# Altium PCB converter.PcbDoc
Units mil, origin at the board's own origin, x right, y up, seen from the top; angles counter-clockwise.
Board outline 2165.35 x 806 mil, 2 copper layers (Top Layer, Bottom Layer); 37 components, 46 nets, 184 pads, 78 vias.
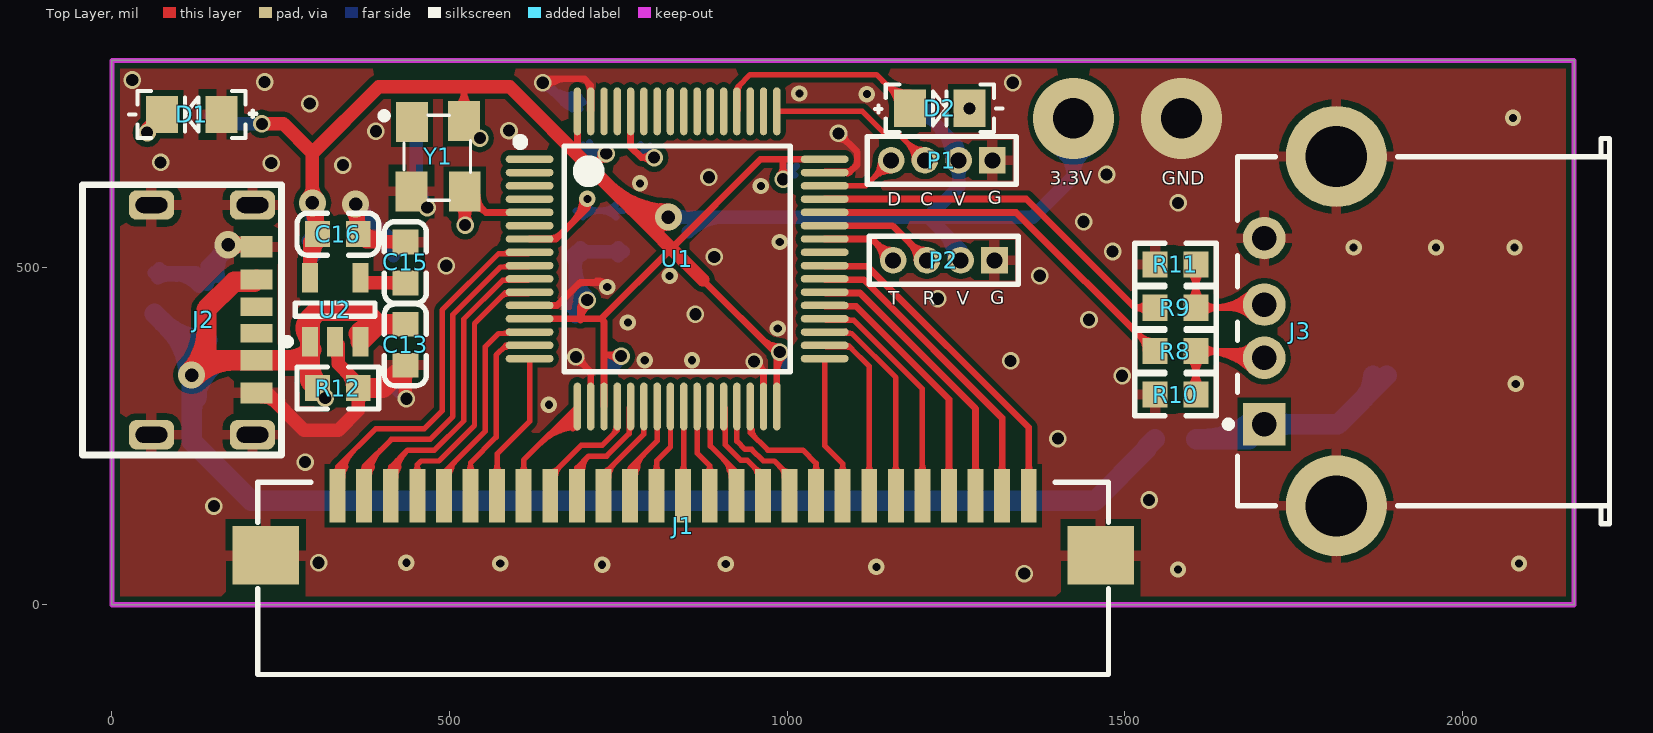
[diagram p0: Top Layer view]
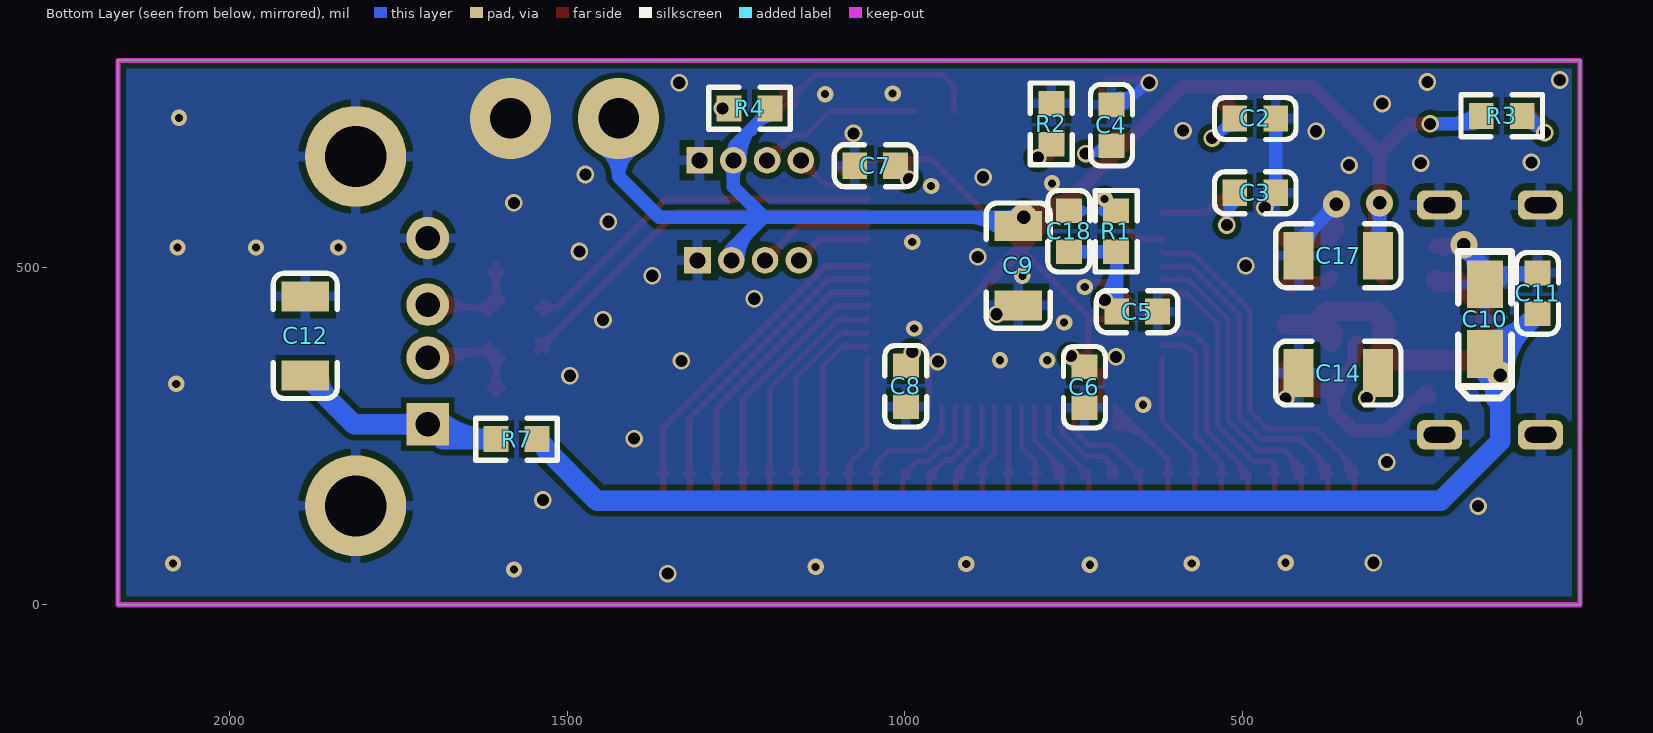
[diagram p1: Bottom Layer view, seen from below]
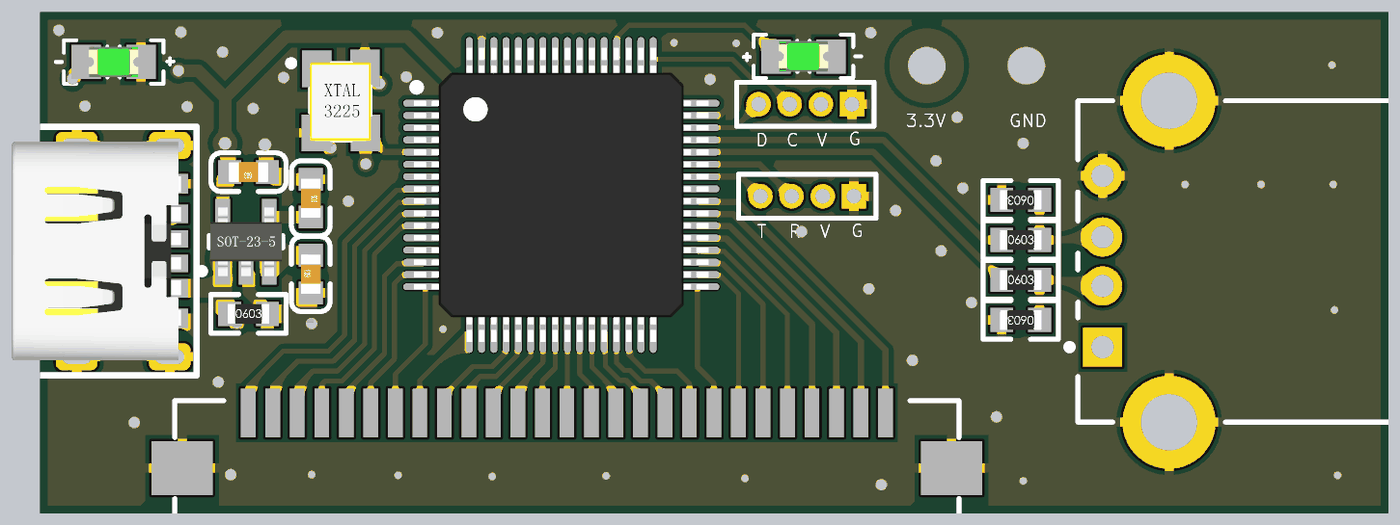
[diagram p2: 3D render of the assembled board from above, using the file's embedded part models]
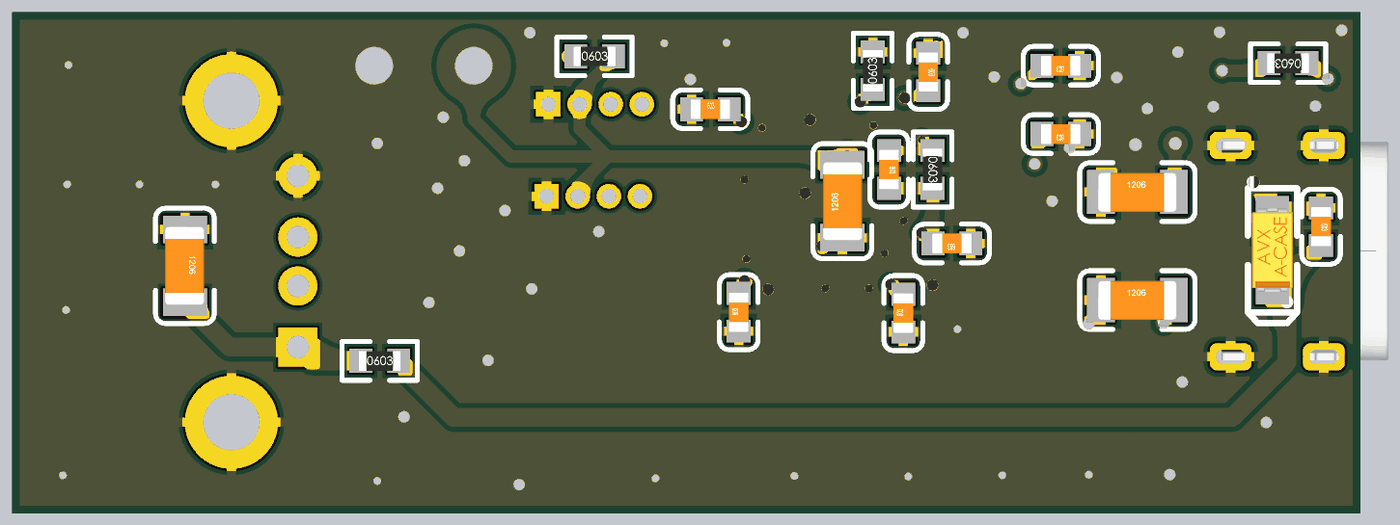
[diagram p3: 3D render of the assembled board from below, using the file's embedded part models]

## Layer stack, top to bottom
Top Solder: solder mask 0.4, Solder Resist, Dk 3.5
Top Layer: signal copper 1.4
Dielectric 1: dielectric 12.6, FR-4, Dk 4.8
Bottom Layer: signal copper 1.4
Bottom Solder: solder mask 0.4, Solder Resist, Dk 3.5

## Board outline
0,0 2165.35,0 2165.35,806 0,806

## Design rules (kind name [scope] priority, off if disabled: settings)
Clearance Clearance_3 [IsText] p1: gap=0
Clearance Clearance_2 [OnLayer('Bottom Overlay')] p2: gap=10
Clearance Clearance_1 [OnLayer('Bottom Overlay')] p3: gap=0
Clearance [All] p4: gap=8
MinimumSolderMaskSliver [All] p1: minsoldermaskwidth=0
PlaneClearance [All] p1: clearance=8
PlaneConnect [All] p1: planeconnectstyle=Relief reliefexpansion=20 reliefentries=4 reliefconductorwidth=15 reliefairgap=10
PolygonConnect PolygonConnect_2 [IsVia] p1: connectstyle=Direct reliefconductorwidth=0 reliefentries=4 polygonreliefangle="90 Angle" airgapwidth=10
PolygonConnect PolygonConnect_1 [IsPad] p2: connectstyle=Relief reliefconductorwidth=15 reliefentries=4 polygonreliefangle="90 Angle" airgapwidth=10
PolygonConnect [All] p3: connectstyle=Direct reliefconductorwidth=10 reliefentries=4 polygonreliefangle="90 Angle" airgapwidth=10
RoutingVias [All] p1: holewidth=28 width=50 viastyle="Through Hole" minholewidth=28 minwidth=50 maxholewidth=28 maxwidth=50
SilkToSolderMaskClearance [IsPad] p1: minsilkscreentomaskgap=0 clearancetoexposedcopper=TRUE
SolderMaskExpansion [All] p1: expansion=4
Width [All] p1: maxlimit=80 minlimit=8 preferedwidth=10 minimp=50.000000 maximp=50.000000 favimp=50.000000 checkconnectedcopper=TRUE
25 further rules are at their usual default settings.

## Components (designator, comment, footprint, x,y, rotation, side; value= is the part's Value field where it differs from the comment)
C2 "0.01u" 0603_C 481,720 r0 bottom
C3 "15p" 0603_C 481,610 r0 bottom
C4 "100nF" 0603_C 694,710 r270 bottom
C5 "100nF" 0603_C 656,434 r0 bottom
C6 "100nF" 0603_C 734,322 r90 bottom
C7 "100nF" 0603_C 1044,650 r180 bottom
C8 "100nF" 0603_C 998.41,323.42 r90 bottom
C9 "10uF (106) 10% 50V" 1206_C 832,502 r90 bottom
C10 "10uF" CASE-A_3216 141,423 r270 bottom
C11 "100nF" 0603_C 63,461 r270 bottom
C12 "10uF" 1206_C 1888,398 r270 bottom
C13 "100nF" 0603_C 434.6,384.76 r90 top
C14 "10uF" 1206_C 358,343 r180 bottom
C15 "22nF" 0603_C 434.6,506.76 r270 top
C16 "100nF" 0603_C 334.6,548.76 r180 top
C17 "10uF" 1206_C 358,516.76 r180 bottom
C18 "100nF" 0603_C 757,553 r270 bottom
D1 "0805" 0805-LED 118,726 r0 top
D2 "0805" 0805-LED 1226,735 r180 top
J1 "FPC-1.0-27P" FPC-1.0-27P 846,122 r0 top
J2 "Type_C-6P" Type_C-6P 214,530 r0 top
J3 "USB" USB_A1 2218,405 r0 top
P1 "MHDR1X4" MHDR1X4 1304,658 r180 top
P2 "MHDR1X4" MHDR1X4 1307,510 r180 top
R1 "10KΩ" 0603_R 687,553 r270 bottom
R2 "10KΩ (1002) ±1%" 0603_R 783,712 r90 bottom
R3 "510R" 0603_R 116,724 r0 bottom
R4 "510R" 0603_R 1230,735 r180 bottom
R7 "0Ω" 0603_R 1575,245 r180 bottom
R8 "22R" 0603_R 1575,375.33 r0 top
R9 "22R" 0603_R 1575,439.67 r0 top
R10 "15K" 0603_R 1575,311 r180 top
R11 "15K" 0603_R 1575,504 r180 top
R12 "100KΩ" 0603_R 334.6,320.76 r0 top
U1 "STM32F105RBT6" LQFP-64_10x10x05P 837,512 r270 top
U2 "RT9193-33GB" SOT23-5 330.6,436.76 r90 top
Y1 "XATLS" XTAL-3225 483,664 r0 top

## Footprints (in the part's own frame and the unit in brackets; to place one, negate y for a bottom-side part, rotate by r counter-clockwise, add the part's x,y. Pads: shape width x height; smd on the part's side, far side on the other; paste and mask are expansions set on the pad)
0603_C [mm]
  rect 0.93x0.98 smd: 1(-0.77,0) 2(0.77,0)
  silkscreen extent -1.53,-0.79 1.54,0.79, body extent -0.8,-0.4 0.8,0.4, height 0.3
0603_R [mm]
  rect 0.93x0.98 smd: 1(-0.77,0) 2(0.77,0)
  silkscreen extent -1.53,-0.79 1.54,0.79, body extent -0.85,-0.4 0.85,0.4, height 0.56
0805-LED [mm]
  rect 1.2x1.4 smd: 1(-1.118,0) 2(1.118,0)
  silkscreen extent -2.36,-0.89 2.44,0.89, body extent -1.01,-0.63 1.01,0.62, height 1.1
1206_C [mm]
  rect 1.13x1.8 smd: 1(-1.49,0) 2(1.49,0)
  silkscreen extent -2.36,-1.2 2.35,1.2, body extent -1.6,-0.81 1.6,0.79, height 1
CASE-A_3216 [mm]
  rect 1.8x1.35 smd: 1(1.31,0) 2(-1.31,0)
  silkscreen extent -2.54,-1 2.97,1, body extent -1.7,-0.84 1.7,0.84, height 1.71
FPC-1.0-27P [mm] "FPC 10mm 27Pin"
  rect 0.6x2 smd: 1(-13,1) 2(-12,1) 3(-11,1) 4(-10,1) 5(-9,1) 6(-8,1) 7(-7,1) 8(-6,1) 9(-5,1) 10(-4,1) 11(-3,1) 12(-2,1) 13(-1,1) 14(0,1) 15(1,1) 16(2,1) 17(3,1) 18(4,1) 19(5,1) 20(6,1) 21(7,1) 22(8,1) 23(9,1) 24(10,1) 25(11,1) 26(12,1) 27(13,1)
  rect 2.5x2.2 smd: GND(-15.7,-1.25) GND(15.7,-1.25)
  silkscreen extent -16,-5.73 16,1.5
LQFP-64_10x10x05P [mm]
  oval 0.28x1.8 smd mask+0.051: 1(-3.75,-5.55) 2(-3.25,-5.55) 3(-2.75,-5.55) 4(-2.25,-5.55) 5(-1.75,-5.55) 6(-1.25,-5.55) 7(-0.75,-5.55) 8(-0.25,-5.55) 9(0.25,-5.55) 10(0.75,-5.55) 11(1.25,-5.55) 12(1.75,-5.55) 13(2.25,-5.55) 14(2.75,-5.55) 15(3.25,-5.55) 16(3.75,-5.55) 33(3.75,5.55) 34(3.25,5.55) 35(2.75,5.55) 36(2.25,5.55) 37(1.75,5.55) 38(1.25,5.55) 39(0.75,5.55) 40(0.25,5.55) 41(-0.25,5.55) 42(-0.75,5.55) 43(-1.25,5.55) 44(-1.75,5.55) 45(-2.25,5.55) 46(-2.75,5.55) 47(-3.25,5.55) 48(-3.75,5.55)
  oval 1.8x0.28 smd mask+0.051: 17(5.55,-3.75) 18(5.55,-3.25) 19(5.55,-2.75) 20(5.55,-2.25) 21(5.55,-1.75) 22(5.55,-1.25) 23(5.55,-0.75) 24(5.55,-0.25) 25(5.55,0.25) 26(5.55,0.75) 27(5.55,1.25) 28(5.55,1.75) 29(5.55,2.25) 30(5.55,2.75) 31(5.55,3.25) 32(5.55,3.75) 49(-5.55,3.75) 50(-5.55,3.25) 51(-5.55,2.75) 52(-5.55,2.25) 53(-5.55,1.75) 54(-5.55,1.25) 55(-5.55,0.75) 56(-5.55,0.25) 57(-5.55,-0.25) 58(-5.55,-0.75) 59(-5.55,-1.25) 60(-5.55,-1.75) 61(-5.55,-2.25) 62(-5.55,-2.75) 63(-5.55,-3.25) 64(-5.55,-3.75)
  silkscreen extent -4.55,-6.05 4.25,4.25, body extent -6.01,-6.01 6.01,6.01, height 1.6
MHDR1X4 [mm] "Connector; Header; 4 Position"
  rect 1x1 hole 0.6: 1(0,0)
  round 1 hole 0.6: 2(1.27,0) 3(2.54,0) 4(3.81,0)
  silkscreen extent -0.9,-0.9 4.71,0.9
SOT23-5 [mm] "Max4173"
  rect 1.1x0.6 smd: 1(-1.2,0.95) 2(-1.2,0) 3(-1.2,-0.95) 4(1.2,-0.95) 5(1.2,0.95)
  silkscreen extent -1.32,-1.5 0.25,1.92, body extent -1.4,-1.45 1.4,1.45, height 1.2
Type_C-6P [mm]
  rect 1.2x0.7 smd: A5(0,-2.25) B5(0,-3.25)
  rect 1.2x0.76 smd: A9(0,-4.27) B9(0,-1.23)
  rect 1.2x0.8 smd: A12(0,-5.5) B12(0,0)
  rrect50% 1.7x1.1 hole 0.6 slot 1.2 at 0 deg: ""(-3.95,-7.07) ""(-3.95,1.57) ""(-0.15,-7.07) ""(-0.15,1.57)
  silkscreen extent -6.55,-7.83 0.95,2.33, body extent -6.59,-7.22 0.31,1.72, height 3.18
USB_A1 [mm]
  rect 1.6x1.6 hole 0.92: 1(-12.99,-3.5)
  round 1.6 hole 0.92: 2(-12.99,-1) 3(-12.99,1) 4(-12.99,3.5)
  round 3.8 hole 2.3: 5(-10.28,6.57) 6(-10.28,-6.57)
  silkscreen extent -14.46,-7.25 0,7.25
XTAL-3225 [mil]
  rect 47.24x59.06 smd: 1(-38.5,51) 2(-39.5,-52) 3(39.5,-52) 4(38.5,52)
  silkscreen extent -85,-65 48,65, body extent -50,-65 48,61, height 31

## Part data
C2 C3 C4 C5 C6 C7 C8 C11 C13 C15 C16 C18: library part "0603 100nF (104) 10% 50V", "贴片电容"
C9 C12 C14 C17: library part "1206 10uF (106) 10% 50V", "贴片电容"
C10: library part "3216 10uF (106) 10% 16V", "钽电容"
D1 D2: library part LED0805
J3: "USB接口"
P1 P2: "Header, 4-Pin"
R1 R2 R3 R4 R8 R9 R10 R11: library part "0603 10KΩ (1002) 1%", "贴片电阻"
R7: library part "0603 0Ω (0R0) 1%", "贴片电阻"
R12: library part "0603 100KΩ (1003) 1%", "贴片电阻"
Y1: "贴片有源晶振"

## Via types
v1: diameter 26, hole 18, Top Layer to Bottom Layer, tented both sides, 46 vias
v2: diameter 24, hole 12, Top Layer to Bottom Layer, tented both sides, 25 vias
v3: diameter 40, hole 20, Top Layer to Bottom Layer, tented both sides, 5 vias
v4: diameter 120, hole 60, Top Layer to Bottom Layer, tented both sides, 2 vias

## Nets (pads, with @x,y where several pads share a name; then routed paths per layer and width w, separated by ;. In a path a pad name is that pad's centre, name@x,y a point inside that pad or via, vN(x,y) a via of type N, cw(c..) or ccw(c..) an arc to the next point about the centre after c; other vN are vias at no path point)
3V3: C2.2 C4.2 C5.2 C6.2 C7.2 C8.2 C9.2 C16.2 C17.2 C18.2 P1.2 P2.2 R1.2 R3.2 R4.2 U1.13 U1.19 U1.32 U1.48 U1.64 U2.5 Y1.4 | length 6448.7
  Top Layer w10: Y1.4 521.5,758.5 ; 530,767 521.5,758.5 ; U1.13 694,423.42 ; 689.36,667.36 U1.64 ; 694,421.66 cw(c718.91,421.66) v1@707.62,443.87 ; 694,437.96 cw(c710.63,437.96) v1@703.09,452.78 ; v1(704,451) 694,441 ; 713,643 713,649 v1(732,668) ; U1.19 728.73,370 ; v1(754,368) 752,370 728.73,370 ; 875,481 984.64,371.36 U1.32 ; 963.39,392.61 ccw(c989,418.21) v1@989,382 ; v1(994,630) 994,658.64 995,659.64 ; U1.48 995,659.64 ; 521.5,758.5 cw(c494.86,758.5) 510.54,736.96 ccw(c494.86,758.5) 521.5,758.5 ; 521.5,758.5 ccw(c548.14,758.5) 532.46,736.96 cw(c548.14,758.5) 521.5,758.5 ; 694,423.42 694,441 ; 694,423.42 724.42,423.42 ; 694,441 cw(c700.01,434.99) 702.07,443.24 ccw(c700.01,434.99) 694,441 ; 694,441 ccw(c687.99,447.01) 696.24,449.07 cw(c687.99,447.01) 694,441 ; 718.34,654.34 cw(c732,640.69) 732,660 ccw(c732,640.69) 718.34,654.34 ; 718.34,654.34 ccw(c704.69,668) 724,668 cw(c704.69,668) 718.34,654.34 ; 724.42,423.42 828.5,527.5 960.64,659.64 995,659.64 ; 724.42,423.42 728.73,419.1 728.73,370 ; 994,649.31 cw(c974.69,649.31) 988.34,635.66 ccw(c974.69,649.31) 994,649.31 ; 994,649.31 ccw(c1013.31,649.31) 999.66,635.66 cw(c1013.31,649.31) 994,649.31 ; 729.86,370 cw(c729.86,343.86) 748.34,362.34 ccw(c729.86,343.86) 729.86,370 ; 739.51,370 ccw(c739.51,382.49) 748.34,373.66 cw(c739.51,382.49) 739.51,370 ; 984.64,344.16 cw(c1018.85,344.16) 994.66,368.34 ccw(c1018.85,344.16) 984.64,344.16
  Top Layer w20: v1(222,712) 254,712 297,669 ; v3@289.93,602.07 ccw(c272.86,619.14) 297,619.14 ccw(c321.14,619.14) v3@304.07,602.07 ; U2.5 293.2,537.67 C16.2 304.28,587.72 v3(297,595) 297,669 ; C16.2@297.09,553.89 ccw(c277.02,565.48) 299.4,571.48 ; C16.2@297.2,543.44 cw(c277.57,531.45) 297.49,519.95 ; 299.82,570.79 cw(c310.71,577.07) v3@303.07,587.06 ; 735.23,620.77 ccw(c824,709.54) v3@824,584 ; 769.37,586.63 ccw(c824,641.25) v3@824,564 ; v3(824,574) 805,555 801,555 ; 875,481 828.5,527.5 801,555 ; 297,669 395,767 530,767 589,767 713,643 801,555 ; 304.28,569.8 cw(c284.23,569.8) 298.41,555.61 ccw(c284.23,569.8) 304.28,569.8 ; 304.28,569.8 ccw(c324.34,569.8) 310.16,555.61 cw(c324.34,569.8) 304.28,569.8 ; 806.93,556.93 cw(c824,539.86) v3@824,564 ; 806.93,556.93 ccw(c789.86,574) 814,574 cw(c789.86,574) 806.93,556.93 ; 806.93,556.93 cw(c824,539.86) v3@824,564 ; v3@289.93,587.93 cw(c255.27,553.27) 304.28,553.27 ccw(c255.27,553.27) v3@289.93,587.93 ; U2.5@293.2,500.95 cw(c351.1,500.95) 310.16,541.9 ccw(c351.1,500.95) U2.5@293.2,500.95
  Bottom Layer w10: C2.2@511.32,705.71 cw(c511.32,671.21) v1@535.71,695.6 ; C2.2 540.32,691 v1(545,691) ; C2.2@523.35,707.97 ccw(c545,729.62) v1@545,699 ; C2.2@523.73,714.62 ccw(c551.77,730.81) v1@546.34,698.89 ; C2.2@524.62,719.02 ccw(c554.37,719.02) 533.34,697.98 ; C2.2@526.57,700.88 ccw(c537.35,719.55) v1@542.93,698.73 ; 529.32,699.29 cw(c520.79,684.51) v1@537.27,688.93 ; C4.2 705.69,668 v1(732,668) ; C4.2@698.01,681.02 ccw(c719.49,690.47) 713.42,667.8 ; C7.2 1013.69,649.68 v1(994,630) ; C4.2@712.69,668 cw(c712.69,648.69) 726.34,662.34 ccw(c712.69,648.69) C4.2@712.69,668 ; C4.2@712.69,668 ccw(c712.69,687.31) 726.34,673.66 cw(c712.69,687.31) C4.2@712.69,668 ; 718.7,671.56 cw(c716.67,663.98) v1@724.26,665.97 ; 718.7,671.56 ccw(c720.73,679.15) v1@726.31,673.63 ; 718.7,671.56 cw(c716.67,663.98) v1@724.26,665.97 ; 718.7,671.56 ccw(c720.73,679.15) v1@726.31,673.63 ; 718.7,671.56 cw(c716.67,663.98) v1@724.26,665.97 ; 718.7,671.56 ccw(c720.73,679.15) v1@726.31,673.63 ; v1(732,668) cw(c732,694.6) 707.33,684.66 ccw(c732,694.6) v1(732,668) ; v1(994,630) cw(c1008.68,615.33) 1011.73,635.85 ccw(c1008.68,615.33) v1(994,630) ; v1(994,630) ccw(c978.24,645.76) 1000.43,647.8 cw(c978.24,645.76) v1(994,630) ; C7.2@1007.66,643.66 cw(c994,657.31) 994,638 ccw(c994,657.31) C7.2@1007.66,643.66 ; C7.2@1007.66,643.66 ccw(c1021.31,630) 1002,630 cw(c1021.31,630) C7.2@1007.66,643.66 ; C4.2@698.05,680.92 ccw(c717.19,688.63) 717.19,668 cw(c717.19,688.63) C4.2@698.05,680.92
  Bottom Layer w15: R4.2@1196.89,723.58 cw(c1184.05,675.66) 1227.01,700.46 ; R4.2@1199.68,723.21 cw(c1199.68,694.74) 1219.81,714.87 ; R4.2 1254,680.68 ; R4.2@1210.49,734.02 ccw(c1234.21,734.02) R4.2@1217.44,717.25 ; R4.2@1217.16,717.53 cw(c1157.63,658) P1.2@1241.82,658 ; 1242.76,691.92 cw(c1208.85,658) P1.2@1256.81,658 ; P1.2 1254,680.68 ; v1(989,374) ccw(c998.49,374) 997.99,364.52 cw(c998.49,374) v1(989,374) ; v1(989,374) 989,363.15 C8.2 ; C8.2 cw(c1011,366.32) 994.19,372.19 ccw(c1011,366.32) C8.2 ; 1254,680.68 cw(c1238.98,680.68) 1247.27,668.16 ccw(c1238.98,680.68) 1254,680.68 ; 1254,680.68 ccw(c1269.02,680.68) 1260.73,668.16 cw(c1269.02,680.68) 1254,680.68
  Bottom Layer w20: R3.2 158.32,712 v1(222,712) ; R3.2@152.19,728.89 ccw(c192.96,769.67) 192.96,712 ; v3@289.93,587.93 cw(c272.86,570.86) 297,570.86 cw(c321.14,570.86) v3@304.07,587.93 ; C17.2@290.68,538.6 ccw(c275.42,553.86) 297,553.86 ; 297,565.15 ccw(c334.54,565.15) C17.2@308,538.6 ; v3(297,595) 297,519.09 C17.2 ; C5.2@686.31,452.65 ccw(c705.65,452.65) C5.2@691.98,438.98 ; 686.32,500.94 ccw(c753.94,500.94) v1@706.12,453.12 ; v1(704,451) 687,434 C5.2 686.31,522 R1.2 C18.2 ; C6.2@751.01,368.2 cw(c734,369.36) C6.2 738.31,352.32 v1(754,368) ; v3(824,574) 1209,574 ; C9.2@831.07,566.93 cw(c848.14,549.86) 848.14,574 cw(c848.14,598.14) C9.2@831.07,581.07 ; C9.2@853.85,552 cw(c906.95,498.9) 906.95,574 ; P1.2@1247.15,651.15 cw(c1230.62,634.62) 1254,634.62 cw(c1277.38,634.62) P1.2@1260.85,651.15 ; P1.2 1254,619 1209,574 ; P2.2 1257,526 1209,574 ; v4@1399.26,676.55 cw(c1375.05,634) 1424,634 ; v4(1424,720) 1424,634 ; v4@1448.74,676.55 ccw(c1472.95,634) 1424,634 ; 686.31,455.04 cw(c666.26,455.04) 680.44,440.86 ccw(c666.26,455.04) 686.31,455.04 ; 686.32,455.04 ccw(c706.37,455.04) 692.19,440.86 cw(c706.37,455.04) 686.32,455.04 ; 708.04,522.68 cw(c708.04,542.74) 693.86,528.56 ccw(c708.04,542.74) 708.04,522.68 ; 708.04,522.68 ccw(c708.04,502.63) 693.86,516.81 cw(c708.04,502.63) 708.04,522.68 ; 735.96,522.68 cw(c735.96,502.63) 750.14,516.81 ccw(c735.96,502.63) 735.96,522.68 ; 735.96,522.68 ccw(c735.96,542.74) 750.14,528.56 cw(c735.96,542.74) 735.96,522.68 ; v1(754,368) cw(c736.14,385.86) 735.27,360.62 ccw(c736.14,385.86) v1(754,368) ; 1209,574 1364,574 1424,634 ; R1.2@680.14,516.81 cw(c665.24,501.91) 686.32,501.91 ccw(c665.24,501.91) R1.2@680.14,516.81 ; C5.2@686.31,426.47 cw(c708.2,426.47) 704.51,448.04 ccw(c708.2,426.47) C5.2@686.31,426.47 ; 686.32,503.35 cw(c705.35,503.35) 691.89,516.81 ccw(c705.35,503.35) 686.32,503.35 ; 1229.15,553.85 cw(c1185.31,510) 1247.32,510 ccw(c1185.31,510) 1229.15,553.85
5V: C10.1 C11.2 C13.2 C14.2 J2.A9 J2.B9 R7.2 R12.1 U2.1 U2.3 | length 3210.6
  Top Layer w30: v3@114.46,343.54 ccw(c53.08,404.92) 139.89,404.92 ; v3(118,340) 139.89,361.89 ; v3@121.54,336.46 cw(c182.92,275.08) 182.92,361.89 ; J2.B9 210.62,478.2 180.85,478.2 139.89,437.24 139.89,361.89 ; 257.97,361.89 ccw(c257.97,414.89) U2.1@295.45,377.41 ; U2.1@290.01,399.23 cw(c337.86,401.14) 304,435 ; U2.1@290.54,397.59 cw(c308.12,409.27) 293.2,424.2 ; R12.1 293.2,331.84 U2.1@293.2,371.2 ; U2.3 393.56,415.07 ; C13.2 393.56,415.07 ; 139.89,361.89 J2.A9 283.89,361.89 U2.1@293.2,371.2 ; U2.1@293.2,371.2 U2.1 293.2,424.2 ; 293.2,424.2 304,435 ; 304,435 373.63,435 393.56,415.07 ; 393.56,415.07 ccw(c393.56,379.55) 365.48,401.31 cw(c393.56,379.55) 393.56,415.07 ; 293.2,356.49 ccw(c339.03,356.49) 306.62,324.08 cw(c339.03,356.49) 293.2,356.49 ; U2.3@365.75,401.61 cw(c398.24,369.11) 398.24,415.07 ccw(c398.24,369.11) U2.3@365.75,401.61
  Bottom Layer w30: C11.2 122.26,371.43 C10.1 118,348.43 v3(118,340) 118,242 206,154 1456,154 1532,230 1532,232.32 R7.2 ; C11.2@74.13,419.56 ccw(c141,486.43) C10.1@141,391.86 ; 84.23,409.45 cw(c14.78,340) v3@113,340 ; C10.1@114.86,336.11 cw(c96.35,313.12) 124.91,305.69 ; 118,279.1 cw(c224.47,279.1) C10.1@149.18,354.38 ; C10.1@118.84,344.93 ccw(c124.61,378.72) C10.1@151.96,358.06 ; C10.1@123,340 cw(c155.41,340) 132.49,362.92 ccw(c155.41,340) C10.1@123,340
  other v1: 316,306
5V_OUT: C12.2 J3.1 R7.1 | length 576.4
  Bottom Layer w30: R7.1 1684.38,245 J3.1 1815.87,267.2 C12.2 ; R7.1@1613.15,245 ccw(c1613.15,360.64) J3.1@1694.92,278.87 ; 1853.12,304.46 ccw(c1818.24,339.34) C12.2@1867.57,339.34 ; 1746.41,267.2 cw(c1746.41,307.03) 1718.25,278.87 ccw(c1746.41,307.03) 1746.41,267.2 ; 1746.41,267.2 ccw(c1746.41,227.38) 1718.25,255.54 cw(c1746.41,227.38) 1746.41,267.2
GND: C2.1 C3.1 C4.1 C5.1 C6.1 C7.1 C8.1 C9.1 C10.2 C11.1 C12.1 C13.1 C14.1 C15.1 C16.1 C17.1 D1.2 J1.GND J2. J2.A12 J2.B12 J3.4 J3.5 J3.6 P1.1 P2.1 R2.2 R10.2 R11.2 R12.2 U1.12 U1.18 U1.31 U1.47 U1.63 U2.2 Y1.2 | length 4209.2
  Top Layer w10: U1.12 659.33,443.1 693.23,477 734,477 v2@737,474 ; v1(638,773) 643.94,778.94 699.09,778.94 709.05,768.98 U1.63 ; v1@644.3,777.93 ccw(c652.4,784.26) 657.54,775.36 ; v1(687,367) 709.05,344.95 U1.18 ; 718.22,479.54 cw(c718.22,457.22) v2@734,473 ; 722.77,479.49 cw(c718.89,472.77) v2@726.55,471.56 ; v1(951,360) 964.95,346.05 U1.31 ; U1.47 1056.68,641.13 1093.09,641.13 ; v1(1076,698) 1103.94,670.06 1103.94,651.97 1093.09,641.13 ; 700.66,353.34 cw(c714.31,367) 695,367 ccw(c714.31,367) 700.66,353.34 ; 700.66,353.34 ccw(c687,339.69) 687,359 cw(c687,339.69) 700.66,353.34 ; 964.66,346.34 cw(c978.31,360) 959,360 ccw(c978.31,360) 964.66,346.34 ; 964.66,346.34 ccw(c951,332.69) 951,352 cw(c951,332.69) 964.66,346.34 ; 1089.66,684.34 cw(c1103.31,698) 1084,698 ccw(c1103.31,698) 1089.66,684.34 ; 1089.66,684.34 ccw(c1076,670.69) 1076,690 cw(c1076,670.69) 1089.66,684.34 ; 1093.09,641.13 cw(c1088.94,645.28) 1085.71,640.38 ccw(c1088.94,645.28) 1093.09,641.13 ; v1@643.66,767.34 cw(c671.65,739.35) 671.65,778.94 ccw(c671.65,739.35) v1@643.66,767.34 ; 702.12,775.91 cw(c686.64,760.43) 708.54,760.43 ccw(c686.64,760.43) 702.12,775.91 ; U1.47@1085.43,640.46 ccw(c1085.43,657.38) 1097.39,645.42 cw(c1085.43,657.38) U1.47@1085.43,640.46
  Top Layer w20: v3(172,533) 211,533 J2.B12 ; J2.A12@226.85,316.34 ccw(c255.29,332.75) 246.79,301.04 ; J2.A12@229.54,313.46 285,258 335,258 364.91,287.91 R12.2 364.91,326.77 335,356.68 335,385.11 U2.2 ; C16.1@357.93,554.24 ccw(c337.18,567.59) v3@361.01,573.97 ; 361.01,568.83 ccw(c336.83,568.83) v3@353.93,585.93 ; 361.01,568.89 cw(c385.11,568.89) v3@368.07,585.93 ; v3(361,593) 364.91,589.09 C16.1 376.6,537.07 C15.1 ; C16.1@369.4,540.78 cw(c381.21,522.38) 392.14,541.32 ; C13.1@422.08,341.92 C13.1@424,340 ; C15.1@435.07,537.07 C15.1 ; v1(436,305) 434.6,306.4 C13.1 C13.1@439.04,350 ; C15.1@440,542.47 C15.1 ; Y1.2 467,588.5 v1(467,588) ; J2.B12@196.14,533 cw(c196.14,557.14) 179.07,540.07 ccw(c196.14,557.14) J2.B12@196.14,533 ; J2.B12@196.14,533 ccw(c196.14,508.86) 179.07,525.93 cw(c196.14,508.86) J2.B12@196.14,533 ; v3@353.93,585.93 cw(c327.41,559.41) 364.91,559.41 ccw(c327.41,559.41) v3@353.93,585.93 ; 364.91,299.72 cw(c384.97,299.72) 370.79,313.9 ccw(c384.97,299.72) 364.91,299.72 ; 364.91,299.72 ccw(c344.86,299.72) 359.04,313.9 cw(c344.86,299.72) 364.91,299.72 ; 364.91,569.8 cw(c344.86,569.8) 359.04,555.61 ccw(c344.86,569.8) 364.91,569.8 ; 364.91,569.8 ccw(c384.97,569.8) 370.79,555.61 cw(c384.97,569.8) 364.91,569.8 ; 413.56,537.07 cw(c413.56,517.02) 427.74,531.2 ccw(c413.56,517.02) 413.56,537.07 ; 413.56,537.07 ccw(c413.56,557.13) 427.74,542.94 cw(c413.56,557.13) 413.56,537.07 ; 434.6,334.39 cw(c454.65,334.39) 440.47,348.57 ccw(c454.65,334.39) 434.6,334.39 ; 434.6,334.39 ccw(c414.54,334.39) 428.72,348.57 cw(c414.54,334.39) 434.6,334.39 ; v3@185.01,533 cw(c185.01,508.88) 202.06,525.94 ccw(c185.01,508.88) v3@185.01,533 ; J2.A12@221.87,307.72 cw(c221.87,275.34) 244.77,298.23 ccw(c221.87,275.34) J2.A12@221.87,307.72 ; U2.2@329.32,378.39 cw(c315.6,364.67) 335,364.67 ccw(c315.6,364.67) U2.2@329.32,378.39 ; 347.18,344.51 cw(c324.41,321.74) 356.61,321.74 ccw(c324.41,321.74) 347.18,344.51 ; C16.1@370.79,553.65 ccw(c410.8,593.66) 410.8,537.07 cw(c410.8,593.66) C16.1@370.79,553.65
  Top Layer w30: R12.2 400.91,320.76 C13.1@422.08,341.92
  Bottom Layer w10: 656.73,759.57 cw(c647.97,708.45) C4.1@690.32,738.41 ; 669.49,747.59 ccw(c673.08,768.5) C4.1@685.33,751.18 ; C4.1@680.53,755.5 cw(c675.84,728.17) C4.1@698.48,744.18 ; C4.1 670.69,740.32 ; v1(638,773) ccw(c685.6,820.6) 691.79,753.57 cw(c685.6,820.6) v1(638,773) ; v1(638,773) 670.69,740.32 ; v1@640.07,765.27 cw(c645.07,746.62) 654.72,763.34 ; v1@640.07,765.27 cw(c645.07,746.62) 654.72,763.34 ; v1@640.07,765.27 cw(c645.07,746.62) 654.72,763.34 ; v1@645.73,775.07 ccw(c664.39,780.07) 654.73,763.34 ; v1@645.73,775.07 ccw(c664.39,780.07) 654.73,763.34 ; v1@645.73,775.07 ccw(c664.39,780.07) 654.73,763.34 ; 651.66,759.34 cw(c665.31,773) 646,773 ccw(c665.31,773) 651.66,759.34 ; 651.66,759.34 ccw(c638,745.69) 638,765 cw(c638,745.69) 651.66,759.34 ; 670.69,740.32 cw(c670.69,728.23) 681.31,733.98 ccw(c670.69,728.23) 670.69,740.32 ; 670.69,740.32 ccw(c670.69,752.4) 681.31,746.65 cw(c670.69,752.4) 670.69,740.32 ; 653.07,757.93 ccw(c688.15,793.01) 692.71,743.61 cw(c688.15,793.01) 653.07,757.93 ; 668.14,742.86 ccw(c690.7,765.42) 693.63,733.65 cw(c690.7,765.42) 668.14,742.86
  Bottom Layer w20: C11.1 124.26,491.32 C10.2 141,502 v3(172,533) ; C11.1@68.14,484.12 cw(c86.11,453) 95.41,487.71 ; C10.2@143.21,480.81 ccw(c113.34,516.31) 159.56,512.33 ; v3(361,593) 416.66,537.34 C17.1 ; C14.1@424,335.66 C14.1 416.66,324.34 v1(436,305) ; C2.1 C3.1 450.68,604.32 v1(467,588) ; 84.04,491.32 cw(c84.04,511.37) 69.86,497.19 ccw(c84.04,511.37) 84.04,491.32 ; 84.04,491.32 ccw(c84.04,471.26) 69.86,485.44 cw(c84.04,471.26) 84.04,491.32 ; 154.93,515.93 cw(c172,498.86) 172,523 ccw(c172,498.86) 154.93,515.93 ; 154.93,515.93 ccw(c137.86,533) 162,533 cw(c137.86,533) 154.93,515.93 ; 159.93,512.09 cw(c180.84,500.02) v3@174.59,523.34 ; 159.93,512.09 ccw(c139.02,524.16) v3@162.34,530.41 ; 159.93,512.09 cw(c180.84,500.02) v3@174.59,523.34 ; 159.93,512.09 ccw(c139.02,524.16) v3@162.34,530.41 ; 159.93,512.09 cw(c180.84,500.02) v3@174.59,523.34 ; 159.93,512.09 ccw(c139.02,524.16) v3@162.34,530.41 ; v3(172,533) ccw(c209.41,495.59) 157.32,486.33 cw(c209.41,495.59) v3(172,533) ; 378.07,575.93 cw(c395.14,593) 371,593 ccw(c395.14,593) 378.07,575.93 ; 378.07,575.93 ccw(c361,558.86) 361,583 cw(c361,558.86) 378.07,575.93 ; v1(436,305) cw(c454.42,323.42) 428.73,327.77 ccw(c454.42,323.42) v1(436,305) ; 450.68,631.04 cw(c430.63,631.04) 444.81,616.86 ccw(c430.63,631.04) 450.68,631.04 ; 450.68,631.04 ccw(c470.74,631.04) 456.56,616.86 cw(c470.74,631.04) 450.68,631.04 ; 450.68,698.96 cw(c470.74,698.96) 456.56,713.14 ccw(c470.74,698.96) 450.68,698.96 ; 450.68,698.96 ccw(c430.63,698.96) 444.81,713.14 cw(c430.63,698.96) 450.68,698.96 ; v1(467,588) cw(c486.42,607.42) 458.98,608.64 ccw(c486.42,607.42) v1(467,588) ; C11.1@81.96,491.32 cw(c81.96,424.39) 129.28,471.71 ccw(c81.96,424.39) C11.1@81.96,491.32 ; 390.53,563.47 cw(c357.01,529.94) 404.42,529.94 ccw(c357.01,529.94) 390.53,563.47
  other v1: 1351,46 306,62 151,146 1536,155 286,211 1401,246 1496,339 1331,361 1447,422 864,430 1223,453 1374,487 495,502 892,515 1482,523 1439,567 1579,595 884,633 1473,637 342,651 236,654 72,655 391,701 588,702 293,742 1334,773 226,774 30,777
  other v2: 1579,52 1132,56 726,59 909,60 575,61 2084,61 436,62 647,296 2079,327 789,362 859,362 986,409 764,418 733.46,470.46 826,487 1839,529 1961,529 2077,529 989,537 961,620 782,624 2075,721 1118,756 1018,757
  other v4: 1584,720
LED_1: D2.2 U1.52 | length 477
  Top Layer w8: U1.52@924.83,761.73 ccw(c920.51,769.21) 928.85,766.98 ; U1.52 927.76,732.68 927.76,767.68 ; U1.52@926.89,761.18 cw(c931.57,763.87) 927.76,767.68 ; 1141.78,775.22 ccw(c1182,815.44) D2.2@1182,758.56 ; 1151.29,765.71 cw(c1124.51,738.94) D2.2@1162.38,738.94 ; 1155.44,761.56 ccw(c1182,788.12) D2.2@1182,750.56 ; D2.2 1132,785 945.08,785 927.76,767.68 ; 927.76,767.68 cw(c920.29,767.68) 924.69,761.65 ccw(c920.29,767.68) 927.76,767.68 ; U1.52@927.09,760.43 cw(c943.01,760.43) 931.76,771.68 ccw(c943.01,760.43) U1.52@927.09,760.43
NetC15_2: C15.2 U2.4 | length 132.7
  Top Layer w20: U2.4 375.56,476.44 C15.2 ; 413.56,476.44 cw(c413.56,456.39) 427.74,470.57 ccw(c413.56,456.39) 413.56,476.44 ; 413.56,476.44 ccw(c413.56,496.5) 427.74,482.31 cw(c413.56,496.5) 413.56,476.44
NetC18_1: C18.1 R1.1 U1.7 | length 489.7
  Top Layer w10: U1.7 657.53,541.53 704,588 ; v2(704,601) 704,588 ; 704,588 cw(c712.57,588) 707.85,595.16 ccw(c712.57,588) 704,588 ; 704,588 ccw(c695.43,588) 700.15,595.16 cw(c695.43,588) 704,588 ; U1.7@648.42,542.04 ccw(c648.42,565.27) 664.84,548.84 cw(c648.42,565.27) U1.7@648.42,542.04 ; 682.86,566.86 ccw(c648.72,601) 697,601 cw(c648.72,601) 682.86,566.86 ; 699.93,583.93 ccw(c682.86,601) 707,601 cw(c682.86,601) 699.93,583.93
  Bottom Layer w10: R1.1 C18.1 ; R1.1@697.39,573.91 cw(c720.11,551.19) 720.11,583.32 cw(c720.11,615.44) R1.1@697.39,592.72 ; v2@701.17,601.99 ccw(c712.66,597.97) 706.57,587.42 ; C18.1@746.61,573.91 ccw(c723.89,551.19) 723.89,583.32 ccw(c723.89,615.44) C18.1@746.61,592.72
NetD1_1: D1.1 R3.1 | length 144.6
  Top Layer w20: v1(52,699) 52,704 D1.1 ; D1.1@55,699 cw(c74.31,699) 60.66,712.66 ccw(c74.31,699) D1.1@55,699
  Bottom Layer w20: v1(52,699) 77,724 R3.1 ; v1@55,702 cw(c85.69,671.31) R3.1@85.69,714.71
NetD2_1: D2.1 R4.1
  other v1: 1270,735
NetJ3_2: J3.2 R8.2 R10.1 | length 618.1
  Top Layer w10: R10.1 R8.2 1696.88,375.33 J3.2 ; R8.2@1614.72,365.92 cw(c1637.44,343.21) 1637.44,375.33 cw(c1637.44,407.46) R8.2@1614.72,384.74 ; R8.2@1619.19,375.33 cw(c1619.19,278.24) J3.2@1687.85,346.89 ; 1643.33,375.33 cw(c1643.33,302.38) J3.2@1694.92,353.97 ; 1666.04,375.33 ccw(c1666.04,406.17) J3.2@1687.85,384.37 ; 1667.47,375.33 cw(c1667.47,326.52) J3.2@1701.99,361.04 ; 1605.32,342.22 cw(c1637.44,342.22) 1614.72,364.94 ccw(c1637.44,342.22) 1605.32,342.22 ; 1605.31,342.22 ccw(c1573.19,342.22) 1595.91,364.94 cw(c1573.19,342.22) 1605.31,342.22 ; 1605.32,344.11 cw(c1573.19,344.11) 1595.91,321.39 ccw(c1573.19,344.11) 1605.32,344.11 ; 1605.32,344.11 ccw(c1637.44,344.11) 1614.72,321.39 cw(c1637.44,344.11) 1605.32,344.11
NetJ3_3: J3.3 R9.2 R11.1 | length 564.2
  Top Layer w10: R11.1 R9.2 1701.88,439.67 J3.3 ; R9.2@1614.72,430.26 cw(c1637.44,407.54) 1637.44,439.67 cw(c1637.44,471.79) R9.2@1614.72,449.08 ; 1631.26,439.67 ccw(c1631.26,519.69) J3.3@1687.85,463.11 ; 1653.97,439.67 cw(c1653.97,391.76) J3.3@1687.85,425.63 ; 1655.4,439.67 ccw(c1655.4,495.55) J3.3@1694.92,456.03 ; 1605.32,470.89 cw(c1637.44,470.89) 1614.72,493.61 ccw(c1637.44,470.89) 1605.32,470.89 ; 1605.32,470.89 ccw(c1573.19,470.89) 1595.91,493.61 cw(c1573.19,470.89) 1605.32,470.89 ; 1605.31,472.78 cw(c1573.19,472.78) 1595.91,450.06 ccw(c1573.19,472.78) 1605.31,472.78 ; 1605.32,472.78 ccw(c1637.44,472.78) 1614.72,450.06 cw(c1637.44,472.78) 1605.32,472.78
NetR2_1: R2.1 U1.60 | length 289.2
  Top Layer w10: U1.60 768.1,677.9 784,662 ; v1@797.28,656.41 ccw(c784,643.44) 784,662 ; v1@797.28,667.59 cw(c784,680.56) 784,662 ; v1(803,662) 784,662
  Bottom Layer w10: R2.1 v1@802.69,662 ; v1(803,662) v1@802.69,662 ; v1@802.68,662 cw(c816.83,676.14) 797.11,679.47 ccw(c816.83,676.14) v1@802.68,662 ; v1@802.68,662 ccw(c786.98,646.3) 785.11,668.43 cw(c786.98,646.3) v1@802.68,662 ; R2.1@788.81,675.88 ccw(c803,690.07) 803,670 cw(c803,690.07) R2.1@788.81,675.88 ; R2.1@789.57,675.12 cw(c776.45,662) 795,662 ccw(c776.45,662) R2.1@789.57,675.12
OSC_IN: C3.2 U1.5 Y1.3 | length 777.5
  Top Layer w10: v1(523,562) v1@522.5,562.5 ; Y1.3@527.19,588.07 cw(c534.13,561.43) 553.6,580.9 ; Y1.3@541.12,606.09 ccw(c571.82,606.09) 550.11,584.39 ; U1.5 553.6,580.9 ; v1@516.07,566 ccw(c500.39,575.05) 517.88,579.74 ; v1@516.07,566 ccw(c500.39,575.05) 517.88,579.74 ; v1@516.07,566 ccw(c500.39,575.05) 517.88,579.74 ; 517.44,581.39 ccw(c537.26,586.7) v1@527,568.93 ; 517.44,581.39 ccw(c537.26,586.7) v1@527,568.93 ; 517.44,581.39 ccw(c537.26,586.7) v1@527,568.93 ; v1@519,568.93 ccw(c510.39,583.84) 527.02,579.38 ; v1@519,568.93 ccw(c510.39,583.84) 527.02,579.38 ; v1@519,568.93 ccw(c510.39,583.84) 527.02,579.38 ; v1@522.5,562.5 cw(c564.21,562.5) 535.37,592.64 ccw(c564.21,562.5) v1@522.5,562.5 ; v1@522.5,562.5 ccw(c480.79,562.5) 509.63,592.64 cw(c480.79,562.5) v1@522.5,562.5 ; v1@522.5,562.5 Y1.3 553.6,580.9 ; 527.79,582.24 ccw(c548.47,576.7) v1@529.93,566 ; 527.79,582.24 ccw(c548.47,576.7) v1@529.93,566 ; 527.79,582.24 ccw(c548.47,576.7) v1@529.93,566 ; v1@517.34,567.66 ccw(c504.89,580.11) 522.5,580.11 cw(c504.89,580.11) v1@517.34,567.66 ; Y1.3@522.5,582.52 ccw(c543.52,582.52) 528.66,567.66 cw(c543.52,582.52) Y1.3@522.5,582.52
  Bottom Layer w10: C3.2@503.6,598.17 cw(c476.86,560.57) v1@523,560.57 ; C3.2@509.4,606.32 cw(c490.65,579.96) 523,579.96 ; C3.2 523,598.32 v1(523,562) ; v1@516.07,566 ccw(c500.44,575.03) 517.88,579.7 ; v1@517.34,567.66 ccw(c503.69,581.31) 523,581.31 ccw(c542.31,581.31) v1@528.66,567.66 ; 517.41,581.42 ccw(c537.29,586.75) v1@527,568.93
PIN1: J1.1 U1.8 | length 798.3
  Top Layer w8: J1.1@330.28,195.69 ccw(c321.17,211.48) 338.78,206.77 ; J1.1 334.19,204.19 ; J1.1@334.28,188.77 ccw(c321.63,210.68) 346.07,204.13 ; 338.79,206.81 ccw(c355.71,202.28) J1.1@340.83,193.05 ; U1.8 616.32,519.67 572.49,519.67 489,436.18 489,287 462.74,260.74 390.74,260.74 334.19,204.19 ; 334.19,204.19 cw(c323.19,204.19) 329.62,195.27 ccw(c323.19,204.19) 334.19,204.19 ; 334.19,204.19 ccw(c345.19,204.19) 338.76,195.27 cw(c345.19,204.19) 334.19,204.19 ; J1.1@334,188.93 cw(c370.38,188.93) 344.66,214.66 ccw(c370.38,188.93) J1.1@334,188.93 ; J1.1@342,188.93 cw(c397.7,188.93) 358.31,228.31 ccw(c397.7,188.93) J1.1@342,188.93 ; 579.68,519.67 ccw(c579.68,530.74) 587.51,522.91 cw(c579.68,530.74) 579.68,519.67
PIN2: J1.2 U1.9 | length 757.2
  Top Layer w8: J1.2@369.65,195.69 ccw(c360.54,211.48) 378.15,206.77 ; J1.2 373.56,204.56 ; J1.2@373.65,188.77 ccw(c361,210.68) 385.44,204.13 ; 378.28,207.26 ccw(c396.25,202.45) J1.2@380.27,192.93 ; U1.9 616.32,499.98 575.44,499.98 505,429.55 505,278.63 471.11,244.74 413.74,244.74 373.56,204.56 ; 373.56,204.56 cw(c361.83,204.56) 368.87,195.18 ccw(c361.83,204.56) 373.56,204.56 ; 373.56,204.56 ccw(c385.29,204.56) 378.25,195.18 cw(c385.29,204.56) 373.56,204.56 ; J1.2@373.37,188.93 cw(c410.65,188.93) 384.29,215.29 ccw(c410.65,188.93) J1.2@373.37,188.93 ; J1.2@381.37,188.93 cw(c437.96,188.93) 397.94,228.95 ccw(c437.96,188.93) J1.2@381.37,188.93 ; 579.68,499.98 ccw(c579.68,511.05) 587.51,503.23 cw(c579.68,511.05) 579.68,499.98
PIN3: J1.3 U1.10 | length 700.1
  Top Layer w8: J1.3@409.1,195.73 ccw(c400.47,211.05) 417.45,206.5 ccw(c433.65,202.16) J1.3@419.51,193.13 ; J1.3 412.93,203.93 ; J1.3@413.02,188.77 ccw(c400.37,210.68) 424.81,204.13 ; U1.10 616.32,480.3 578.38,480.3 521,422.92 521,272 477.74,228.74 437.74,228.74 412.93,203.93 ; 412.93,203.93 cw(c402.43,203.93) 408.45,195.33 ccw(c402.43,203.93) 412.93,203.93 ; 412.93,203.93 ccw(c423.42,203.93) 417.41,195.33 cw(c423.42,203.93) 412.93,203.93 ; J1.3@412.74,188.93 cw(c448.5,188.93) 423.21,214.21 ccw(c448.5,188.93) J1.3@412.74,188.93 ; J1.3@420.74,188.93 cw(c475.81,188.93) 436.87,227.87 ccw(c475.81,188.93) J1.3@420.74,188.93 ; 579.68,480.3 ccw(c579.68,491.37) 587.51,483.54 cw(c579.68,491.37) 579.68,480.3
PIN4: J1.4 U1.11 | length 523.2
  Top Layer w8: J1.4 452.3,207.3 ; 582.02,459.52 ccw(c579.79,467.86) U1.11@587.27,463.54 ; U1.11 616.32,460.61 581.32,460.61 ; 452.3,207.3 cw(c434.61,207.3) 446.88,194.55 ccw(c434.61,207.3) 452.3,207.3 ; 452.3,207.3 ccw(c469.99,207.3) 457.72,194.55 cw(c469.99,207.3) 452.3,207.3 ; 452.3,207.3 457.74,212.74 484.37,212.74 537,265.37 537,416.29 581.32,460.61 ; 581.32,460.61 ccw(c581.32,468.08) 587.35,463.68 cw(c581.32,468.08) 581.32,460.61 ; 581.32,460.61 cw(c585.13,456.8) 587.82,461.48 ccw(c585.13,456.8) 581.32,460.61 ; 577.32,456.61 cw(c588.57,445.36) 588.57,461.28 ccw(c588.57,445.36) 577.32,456.61
PIN5: J1.5 U1.14 | length 436.2
  Top Layer w8: J1.5 491.67,195.67 553,257 553,382 572.56,401.56 616.32,401.56 U1.14 ; J1.5@491.75,188.76 ccw(c482.67,207.84) 503.08,202.37 ; J1.5@491.48,188.93 cw(c507.3,188.93) 496.11,200.11 ccw(c507.3,188.93) J1.5@491.48,188.93 ; J1.5@499.48,188.93 cw(c534.61,188.93) 509.77,213.77 ccw(c534.61,188.93) J1.5@499.48,188.93 ; 579.68,401.56 ccw(c579.68,412.63) 587.51,404.8 cw(c579.68,412.63) 579.68,401.56
PIN6: J1.6 U1.15 | length 370.4
  Top Layer w8: J1.6 531.04,210.04 569,248 569,369.55 583.49,384.05 U1.15 ; 582.02,380.78 ccw(c579.79,389.12) U1.15@587.27,384.8 ; 531.04,207.79 cw(c512.18,207.79) 525.52,194.45 ccw(c512.18,207.79) 531.04,207.79 ; 531.04,207.79 ccw(c549.9,207.79) 536.56,194.45 cw(c549.9,207.79) 531.04,207.79 ; 577.32,377.87 cw(c588.57,366.62) 588.57,382.54 ccw(c588.57,366.62) 577.32,377.87
PIN7: J1.7 U1.16 | length 282.2
  Top Layer w8: J1.7 570.41,223.41 618.5,271.5 U1.16 ; 570.41,207.79 cw(c551.55,207.79) 564.89,194.45 ccw(c551.55,207.79) 570.41,207.79 ; 570.41,207.79 ccw(c589.27,207.79) 575.93,194.45 cw(c589.27,207.79) 570.41,207.79
PIN8: J1.8 U1.17 | length 543.7
  Top Layer w8: J1.8 609.78,213.91 U1.17 ; 671.56,265.29 cw(c676.84,245.58) U1.17@688.5,262.33 ; 682.56,260.71 ccw(c680.86,269.26) U1.17@688.11,264.42 ; 609.78,207.79 cw(c590.92,207.79) 604.26,194.45 ccw(c590.92,207.79) 609.78,207.79 ; 609.78,207.79 ccw(c628.64,207.79) 615.3,194.45 cw(c628.64,207.79) 609.78,207.79 ; 635.7,239.84 cw(c689.36,186.18) 689.36,262.06 ccw(c689.36,186.18) 635.7,239.84 ; 649.36,253.49 cw(c689.36,213.49) 689.36,270.06 ccw(c689.36,213.49) 649.36,253.49 ; 663.02,267.15 cw(c689.36,240.8) 689.36,278.06 ccw(c689.36,240.8) 663.02,267.15 ; 676.67,280.81 cw(c689.36,268.12) 689.36,286.06 ccw(c689.36,268.12) 676.67,280.81
PIN9: J1.9 U1.20 | length 282.4
  Top Layer w8: J1.9 651,163.22 651,192 695,236 725.92,236 748.42,258.49 U1.20 ; 745.15,257.02 cw(c753.49,254.79) U1.20@749.17,262.27 ; J1.9@649.15,196.74 ccw(c649.15,212.65) 660.4,201.4 cw(c649.15,212.65) J1.9@649.15,196.74 ; J1.9@656.96,188.93 cw(c678.77,188.93) 663.35,204.35 ccw(c678.77,188.93) J1.9@656.96,188.93 ; 742.24,252.32 ccw(c730.99,263.57) 746.91,263.57 cw(c730.99,263.57) 742.24,252.32
PIN10: J1.10 U1.21 | length 330.9
  Top Layer w8: J1.10@688.52,190.15 688.52,202.52 ; J1.10@688.64,188.78 ccw(c672.78,208.5) 697.93,205.77 ; U1.21 765.93,291.32 765.93,253.38 732.55,220 706,220 ; 688.52,202.52 cw(c680.6,202.52) 684.59,195.68 ccw(c680.6,202.52) 688.52,202.52 ; 688.52,202.52 ccw(c696.44,202.52) 692.45,195.68 cw(c696.44,202.52) 688.52,202.52 ; 688.52,202.52 706,220 ; 706,220 ccw(c730.55,195.45) 696.24,190.13 cw(c730.55,195.45) 706,220 ; J1.10@688.33,188.9 cw(c711.25,192.45) 694.85,208.85 ccw(c711.25,192.45) J1.10@688.33,188.9 ; 765.93,254.68 cw(c777,254.68) 769.17,262.51 ccw(c777,254.68) 765.93,254.68
PIN11: J1.11 U1.22 | length 233.6
  Top Layer w8: J1.11 727.89,193.89 734,200 735.18,200 787.79,252.61 U1.22 ; J1.11@727.95,188.75 ccw(c721.93,205.19) J1.11@738.84,200.66 ; J1.11@727.89,196.74 ccw(c727.89,206.47) 734.77,199.59 cw(c727.89,206.47) J1.11@727.89,196.74 ; J1.11@735.7,188.93 cw(c763.69,188.93) 743.9,208.72 ccw(c763.69,188.93) J1.11@735.7,188.93
PIN12: J1.12 U1.23 | length 353.2
  Top Layer w8: J1.12@764.06,196.06 ccw(c758.78,207.83) 771.24,204.49 ccw(c783.13,201.3) J1.12@773.42,193.73 ; J1.12 767.26,202.26 ; J1.12@767.35,188.77 ccw(c754.7,210.68) 779.14,204.13 ; U1.23 807.47,242.47 767.26,202.26 ; 767.26,202.26 cw(c759.79,202.26) 763.44,195.74 ccw(c759.79,202.26) 767.26,202.26 ; 767.26,202.26 ccw(c774.73,202.26) 771.08,195.74 cw(c774.73,202.26) 767.26,202.26 ; J1.12@767.07,188.93 cw(c798.8,188.93) 776.36,211.36 ccw(c798.8,188.93) J1.12@767.07,188.93 ; J1.12@775.07,188.93 cw(c826.11,188.93) 790.02,225.02 ccw(c826.11,188.93) J1.12@775.07,188.93
PIN13: J1.13 U1.24 | length 199.9
  Top Layer w8: J1.13 806.63,213 827.16,233.53 U1.24 ; 806.63,207.79 cw(c787.77,207.79) 801.11,194.45 ccw(c787.77,207.79) 806.63,207.79 ; 806.63,207.79 ccw(c825.49,207.79) 812.15,194.45 cw(c825.49,207.79) 806.63,207.79
PIN14: J1.14 U1.25 | length 191.7
  Top Layer w8: J1.14 846.84,162.21 U1.25 ; J1.14@840.48,194.45 ccw(c825.11,209.82) 846.84,209.82 cw(c825.11,209.82) J1.14@840.48,194.45 ; 846.84,205.75 ccw(c862.82,205.75) 851.52,194.45 cw(c862.82,205.75) 846.84,205.75
PIN15: J1.15 U1.26 | length 188.7
  Top Layer w8: U1.26 866.53,224.47 885.37,205.63 ; J1.15 885.37,205.63 ; 885.37,205.63 cw(c871.42,205.63) 880.36,194.92 ccw(c871.42,205.63) 885.37,205.63 ; 885.37,205.63 ccw(c899.32,205.63) 890.38,194.92 cw(c899.32,205.63) 885.37,205.63
PIN16: J1.16 U1.27 | length 251.2
  Top Layer w8: U1.27 886.21,234.79 924.74,196.26 J1.16 ; 913.24,202.71 ccw(c934.4,208.38) J1.16@924.66,188.76 ; 906.22,214.78 cw(c880.37,188.93) 916.93,188.93 ccw(c880.37,188.93) 906.22,214.78 ; 919.88,201.12 cw(c907.69,188.93) 924.93,188.93 ccw(c907.69,188.93) 919.88,201.12
PIN17: J1.17 U1.28 | length 239.2
  Top Layer w8: U1.28 908.07,291.32 908.07,236.93 931,214 940.75,214 958.01,196.74 959.01,196.74 964.11,191.64 J1.17 ; U1.28@904.83,262.51 cw(c897,254.68) 908.07,254.68 ccw(c897,254.68) U1.28@904.83,262.51 ; 949.57,205.18 cw(c933.32,188.93) 956.3,188.93 ccw(c933.32,188.93) 949.57,205.18 ; 953.69,201.06 ccw(c964.11,211.48) 964.11,196.74 cw(c964.11,211.48) 953.69,201.06
PIN18: J1.18 U1.29 | length 238.9
  Top Layer w8: U1.29 925.58,242.04 937.63,230 947.37,230 964.63,212.74 980.89,212.74 1003.48,190.15 J1.18 ; 989.28,204.35 cw(c973.86,188.93) 995.67,188.93 ccw(c973.86,188.93) 989.28,204.35 ; 992.23,201.4 ccw(c1003.48,212.65) 1003.48,196.74 cw(c1003.48,212.65) 992.23,201.4
PIN19: J1.19 U1.30 | length 308.3
  Top Layer w8: U1.30@944.51,262.27 cw(c940.19,254.79) 948.54,257.02 ; U1.30 945.27,254.73 971.26,228.74 1023.26,228.74 1042.85,209.15 J1.19 ; 1042.85,207.79 cw(c1023.99,207.79) 1037.33,194.45 ccw(c1023.99,207.79) 1042.85,207.79 ; 1042.85,207.79 ccw(c1061.71,207.79) 1048.37,194.45 cw(c1061.71,207.79) 1042.85,207.79 ; U1.30@946.78,263.57 ccw(c971.78,263.57) 954.1,245.9 cw(c971.78,263.57) U1.30@946.78,263.57
PIN20: J1.20 U1.33 | length 273.3
  Top Layer w8: U1.33 1055.5,235.5 1082.22,208.78 J1.20 ; 1082.22,207.79 cw(c1063.36,207.79) 1076.7,194.45 ccw(c1063.36,207.79) 1082.22,207.79 ; 1082.22,207.79 ccw(c1101.08,207.79) 1087.74,194.45 cw(c1101.08,207.79) 1082.22,207.79
PIN21: J1.21 U1.34 | length 389.7
  Top Layer w8: U1.34 1057.68,381.87 1092.68,381.87 ; U1.34@1086.73,384.8 ccw(c1094.21,389.12) 1091.98,380.78 ; J1.21 1121.59,352.96 1092.68,381.87 ; 1092.68,381.87 ccw(c1088.87,378.06) 1086.18,382.74 cw(c1088.87,378.06) 1092.68,381.87 ; 1092.68,381.87 cw(c1092.68,389.34) 1086.65,384.94 ccw(c1092.68,389.34) 1092.68,381.87 ; 1121.59,207.79 cw(c1102.73,207.79) 1116.07,194.45 ccw(c1102.73,207.79) 1121.59,207.79 ; 1121.59,207.79 ccw(c1140.45,207.79) 1127.11,194.45 cw(c1140.45,207.79) 1121.59,207.79 ; U1.34@1085.43,382.54 cw(c1085.43,366.62) 1096.68,377.87 ccw(c1085.43,366.62) U1.34@1085.43,382.54
PIN22: J1.22 U1.35 | length 384.9
  Top Layer w8: U1.35 1057.68,401.56 1095.62,401.56 1160.96,336.22 J1.22 ; 1160.96,207.79 cw(c1142.1,207.79) 1155.44,194.45 ccw(c1142.1,207.79) 1160.96,207.79 ; 1160.96,207.79 ccw(c1179.82,207.79) 1166.48,194.45 cw(c1179.82,207.79) 1160.96,207.79 ; U1.35@1086.49,404.8 ccw(c1094.32,412.63) 1094.32,401.56 cw(c1094.32,412.63) U1.35@1086.49,404.8
PIN23: J1.23 U1.36 | length 422.6
  Top Layer w8: U1.36 1057.68,421.24 1098.56,421.24 1200.33,319.48 J1.23 ; 1200.33,207.79 cw(c1181.47,207.79) 1194.81,194.45 ccw(c1181.47,207.79) 1200.33,207.79 ; 1200.33,207.79 ccw(c1219.19,207.79) 1205.85,194.45 cw(c1219.19,207.79) 1200.33,207.79 ; U1.36@1086.49,424.49 ccw(c1094.32,432.31) 1094.32,421.24 cw(c1094.32,432.31) U1.36@1086.49,424.49
PIN24: J1.24 U1.37 | length 410.4
  Top Layer w10: U1.37 1056.68,441.93 1101.92,441.93 1239.7,304.15 J1.24 ; J1.24@1234.88,193.75 ccw(c1223.26,205.37) 1239.7,205.37 ccw(c1256.14,205.37) J1.24@1244.52,193.75
PIN25: J1.25 U1.38 | length 449.7
  Top Layer w10: U1.38 1056.68,461.61 1107.69,461.61 1279.07,290.23 J1.25 ; J1.25@1274.25,193.75 ccw(c1262.63,205.37) 1279.07,205.37 ccw(c1295.51,205.37) J1.25@1283.89,193.75
PIN26: J1.26 U1.39 | length 489.1
  Top Layer w10: U1.39 1056.68,481.3 1113.46,481.3 1318.44,276.32 J1.26 ; J1.26@1313.62,193.75 ccw(c1302,205.37) 1318.44,205.37 ccw(c1334.88,205.37) J1.26@1323.26,193.75
PIN27: J1.27 U1.40 | length 528.5
  Top Layer w10: U1.40 1056.68,500.98 1119.23,500.98 1357.81,262.41 J1.27 ; J1.27@1352.99,193.75 ccw(c1341.37,205.37) 1357.81,205.37 ccw(c1374.25,205.37) J1.27@1362.63,193.75
SWCLK: P1.3 U1.49 | length 308.9
  Top Layer w8: U1.49 1111.31,730.5 1146.38,695.44 1166.56,695.44 P1.3 ; P1.3@1188.31,658 ccw(c1150.45,658) 1177.22,684.78 ccw(c1204,711.55) P1.3@1204,673.68
SWDIO: P1.4 U1.46 | length 173.6
  Top Layer w8: U1.46 1116.27,620.27 P1.4 ; P1.4@1138.31,658 cw(c1100.45,658) 1127.22,631.22 cw(c1154,604.45) P1.4@1154,642.32
UART1_RX: P2.3 U1.43 | length 228.4
  Top Layer w10: U1.43 1155.79,561.21 P2.3 ; P2.3@1192.31,510 ccw(c1156.86,510) 1181.93,535.07 ccw(c1207,560.14) P2.3@1207,524.69
UART1_TX: P2.4 U1.42 | length 170.2
  Top Layer w10: U1.42 1125.47,541.53 P2.4 ; P2.4@1142.31,510 ccw(c1106.86,510) 1131.93,535.07 ccw(c1157,560.14) P2.4@1157,524.69
USB_DM: R8.1 U1.44 | length 624.8
  Top Layer w10: U1.44 1339.12,580.9 R8.1 ; 1520.29,399.73 ccw(c1544.69,424.13) R8.1@1544.69,389.62 ; 1522.66,397.35 cw(c1501.63,376.32) R8.1@1531.38,376.32
USB_DP: R9.1 U1.45 | length 644.9
  Top Layer w10: U1.45 1354.1,600.58 1515.02,439.67 ; R9.1 1515.02,439.67 ; 1515.02,439.67 cw(c1515.02,413.25) 1534.75,430.82 ccw(c1515.02,413.25) 1515.02,439.67 ; 1515.02,439.67 ccw(c1515.02,466.08) 1534.75,448.52 cw(c1515.02,466.08) 1515.02,439.67
pads on no net: J2.A5 J2.B5 U1.1 U1.2 U1.3 U1.4 U1.6 U1.41 U1.50 U1.51 U1.53 U1.54 U1.55 U1.56 U1.57 U1.58 U1.59 U1.61 U1.62 Y1.1

## Polygon pours and split planes (outlines as drawn)
GND on Top Layer "Top Layer-No Net" (solid, remove dead copper, pour order 2): 0,806 2165.35,806 2165.35,0 0,0
GND on Bottom Layer "Top Layer-No Net" (solid, remove dead copper, pour order 4): 1,806 2165.35,806 2165.35,1 2164.35,0 0,0

## Keep-outs
Keep-Out Layer:
  the board outline again, w7.87

## Silkscreen, mask and mechanical layers (free items; w line width, h text height)
Top Overlay:
  text "3.3V" at 1389,622 h20
  text "GND" at 1555,622 h20
  text "G" at 1297,593 h20
  text "D" at 1148,591 h20
  text "C" at 1197,591 h20
  text "V" at 1246,591 h20
  text "G" at 1301,445 h20
  text "T" at 1150,444 h20
  text "R" at 1201,444 h20
  text "V" at 1251,444 h20